# Altium PCB BorneChargement.PcbDoc
Units mm, origin at the board's own origin, x right, y up, seen from the top; angles counter-clockwise.
Board outline 60.5 x 40.5 mm, 2 copper layers (Top Layer, Bottom Layer); 12 components, 11 nets, 43 pads, 0 vias.
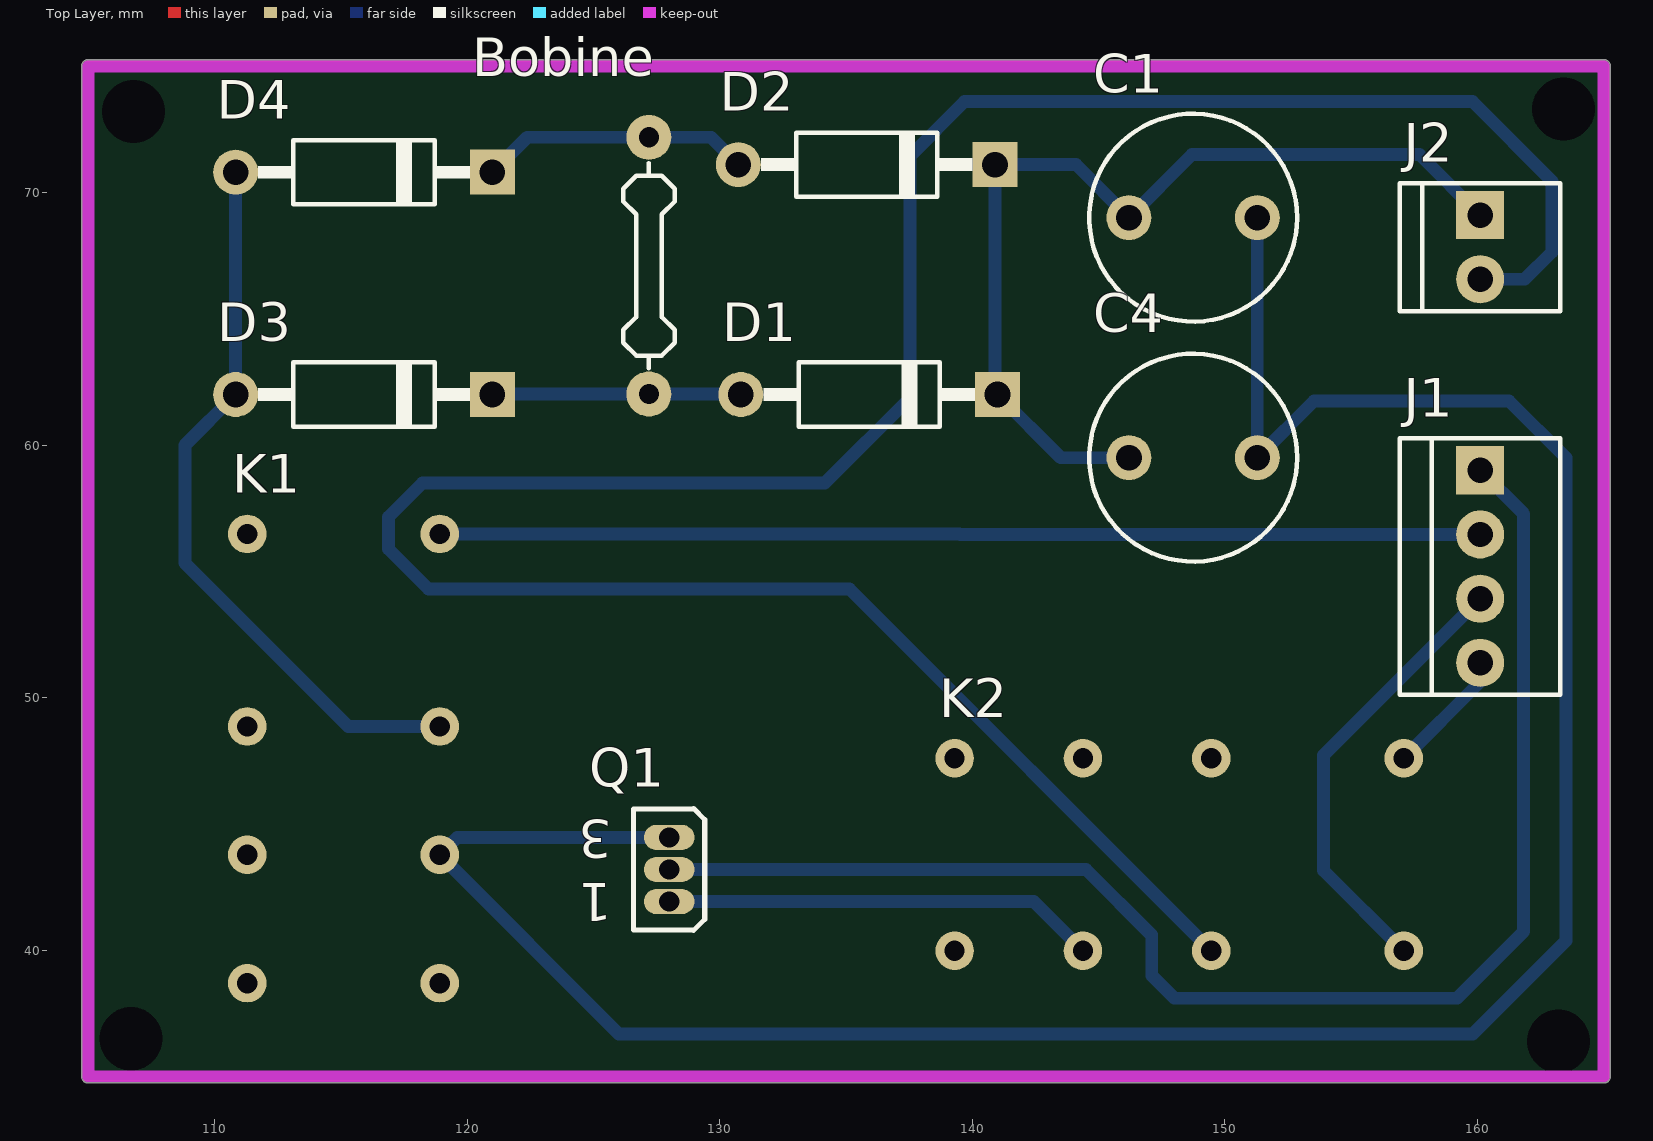
[diagram p0: Top Layer view]
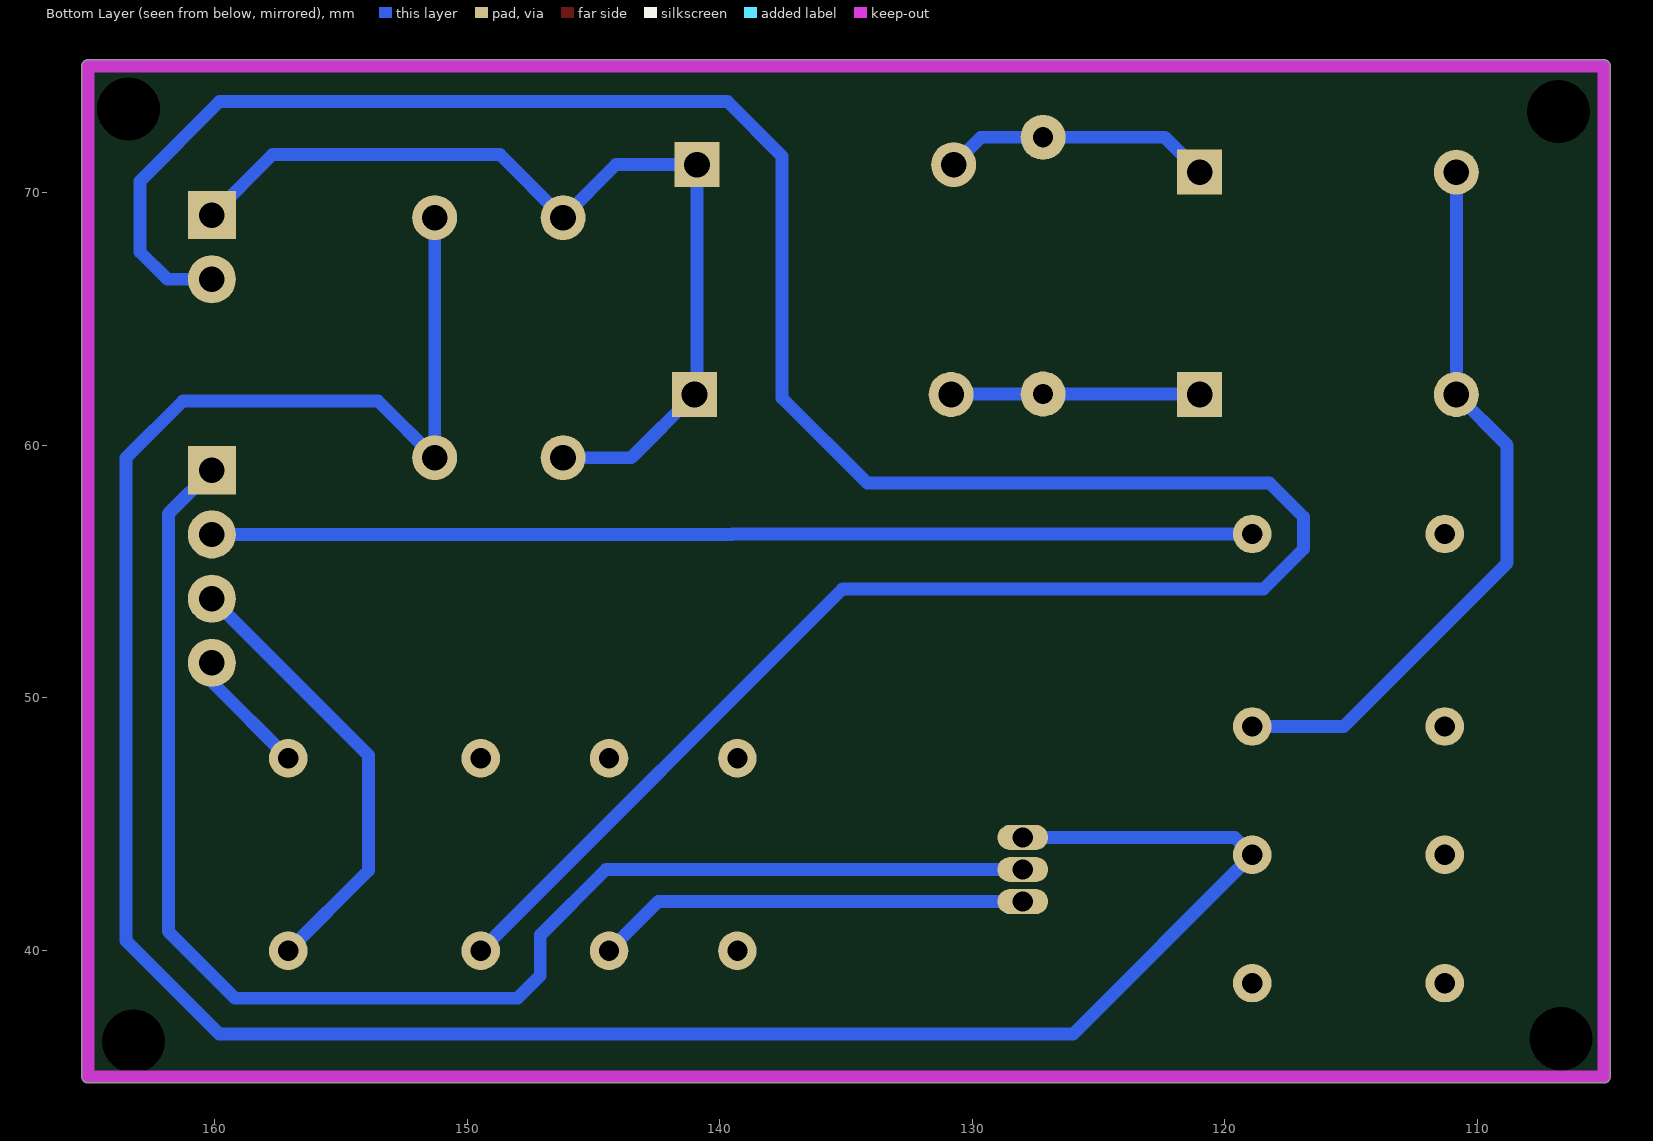
[diagram p1: Bottom Layer view, seen from below]

## Layer stack, top to bottom
Top Solder: solder mask 0.0102, Solder Resist, Dk 3.5
Top Layer: signal copper 0.0356
Dielectric 1: dielectric 0.32, FR-4, Dk 4.8
Bottom Layer: signal copper 0.0356
Bottom Solder: solder mask 0.0102, Solder Resist, Dk 3.5

## Board outline
104.75,35 ccw(c105,35) 105,34.75 165,34.75 ccw(c165,35) 165.25,35 165.25,75 ccw(c165,75) 165,75.25 105,75.25 ccw(c105,75) 104.75,75

## Design rules (kind name [scope] priority, off if disabled: settings)
Clearance [All] p1: gap=0.508
PolygonConnect [All] p1: connectstyle=Relief reliefconductorwidth=0.254 reliefentries=4 polygonreliefangle="90 Angle" airgapwidth=0.254
RoomDefinition BorneChargement [InComponentClass('BorneChargement')] p1 off: confinementstyle=ConfineIn formatcopy=TRUE lockcomponents=FALSE outline 178.943,26.924 267.589,26.924 267.589,49.276 178.943,49.276
RoutingLayers [All] p1: top layer_v5=FALSE bottom layer_v5=TRUE
RoutingVias [All] p1: holewidth=0.711 width=1.27 viastyle="Through Hole" minholewidth=0.711 minwidth=1.27 maxholewidth=0.711 maxwidth=1.27
SolderMaskExpansion [All] p1: expansion=0.102
Width [All] p1: maxlimit=0.508 minlimit=0.508 preferedwidth=0.508
29 further rules are at their usual default settings.

## Components (designator, comment, footprint, x,y, rotation, side; value= is the part's Value field where it differs from the comment)
Bobine "Res 1/4W" "Axial 0.4\" Step" 127.2,67.1 r270 top
C1 "Cap Electrolytic" "Cap Rad Round 0.325D 0.2Pad" 146.2,69 r0 top
C4 "Cap Electrolytic" "Cap Rad Round 0.325D 0.2Pad" 146.2,59.5 r0 top
D1 "Diode 1N4004" DO-41 141,62 r180 top
D2 "Diode 1N4004" DO-41 140.9,71.1 r180 top
D3 "Diode 1N4004" DO-41 121,62 r180 top
D4 "Diode 1N4004" DO-41 121,70.8 r180 top
J1 "MTA100-4" "MTA100-4 MF" 160.1,59 r180 top
J2 "Input" MTA100-2 160.1,69.1 r180 top
K1 "Relay" PCBComponent_1 111.3,38.7 r0 top
K2 "Relay" PCBComponent_1 139.3,47.6 r270 top
Q1 "MOSFET-N" E3 128,43.2 r180 top

## Footprints (in the part's own frame and the unit in brackets; to place one, negate y for a bottom-side part, rotate by r counter-clockwise, add the part's x,y. Pads: shape width x height; smd on the part's side, far side on the other; paste and mask are expansions set on the pad)
"Axial 0.4\" Step" [mil] "Axial 3D Step"
  round 70 hole 31.5: 1(-200,0) 2(200,0)
  silkscreen extent -160,-40 160,40, body extent -212,-45 212,46, height 116
"Cap Rad Round 0.325D 0.2Pad" [mil]
  round 70 hole 40: 1(0,0) 2(200,0)
  silkscreen extent -62,-162 262,162
DO-41 [mil] "Diode 400mil Spacin"
  rect 70x70 hole 40: 1(0,0)
  round 70 hole 40: 2(400,0)
  silkscreen extent 35,-50 365,50, body extent -17,-53 417,53, height 132
E3 [mm] "TO, Flat Index; 3 In-Line, Axial Leads; Body Dia. 4.6mm; Lead Dia. 0.5 mm (max)"
  oval 2x1 hole 0.8: 1(0,1.27) 2(0,0) 3(0,-1.27)
  silkscreen extent -1.41,-2.41 1.41,2.41
MTA100-2 [mil] "MTA100-2 M"
  rect 75x75 hole 39.4: 1(0,0)
  round 75 hole 39.4: 2(0,100)
  silkscreen extent -125,-50 125,150, body extent -125,-50 125,150, height 100
"MTA100-4 MF" [mil] "MTA100-4 MF"
  rect 75x75 hole 39.4: 1(0,0)
  round 75 hole 39.4: 2(0,100) 3(0,200) 4(0,300)
  silkscreen extent -125,-50 125,350, body extent -125,-50 125,350, height 627
PCBComponent_1 [mil]
  round 60 hole 31.5: 1(300,700) 4(300,400) 6(300,200) 8(300,0) 9(0,0) 11(0,200) 13(0,400) 16(0,700)

## Part data
Bobine: "Resistor"
C1 C4: "Polarized Capacitor (Radial)"
D1 D2 D3 D4: "Diode"
J1: "MTA100-4M"
J2: library part MTA100-2, "MTA Male 0 Degres"
K1 K2: library part Component_1
Q1: "N-Channel MOSFET"

## Free pads (board coordinates)
  round 1.524 hole 2.5: 0(106.8,73.2) 0(163.2,36.4) 1(106.7,36.5) 2(163.4,73.3)

## Nets (pads, with @x,y where several pads share a name; then routed paths per layer and width w, separated by ;. In a path a pad name is that pad's centre, name@x,y a point inside that pad or via, vN(x,y) a via of type N, cw(c..) or ccw(c..) an arc to the next point about the centre after c; other vN are vias at no path point)
CHARGE: J1.2 K1.1 | length 41.2
  Bottom Layer w0.508: K1.1 139.497,56.48 139.517,56.46 J1.2
DECHARGE: J1.3 K2.1 | length 17.8
  Bottom Layer w0.508: K2.1 153.9,43.16 153.9,47.72 J1.3
GND: J1.4 K1.8 K1.16 K2.8 K2.16 | length 5
  Bottom Layer w0.508: K2.16 160.1,50.62 J1.4
MOSFET: J1.1 Q1.2 | length 56.9
  Bottom Layer w0.508: Q1.2 144.5,43.2 147.1,40.6 147.1,39 148,38.1 159.182,38.1 161.823,40.742 161.823,57.277 J1.1
NetBobine_1: Bobine.1 D2.2 D4.1 | length 10.8
  Bottom Layer w0.508: D4.1 122.38,72.18 Bobine.1 129.66,72.18 D2.2
NetBobine_2: Bobine.2 D1.2 D3.1 | length 9.9
  Bottom Layer w0.508: D3.1 121.02,62.02 Bobine.2 130.82,62.02 D1.2
NetC1_1: C1.1 C4.1 D1.1 D2.1 J2.1 | length 37.5
  Bottom Layer w0.508: C4.1 143.5,59.5 D1.1 140.9,62.1 D2.1 144.1,71.1 C1.1 148.7,71.5 157.7,71.5 J2.1
NetC1_2: C1.2 C4.2 K1.6 Q1.3 | length 101.1
  Bottom Layer w0.508: Q1.3 119.61,44.47 K1.6 126.007,36.693 159.807,36.693 163.495,40.381 163.495,59.495 161.245,61.745 153.525,61.745 C4.2 C1.2
NetD3_2: D3.2 D4.2 K1.4 | length 29.1
  Bottom Layer w0.508: D4.2 D3.2 108.83,59.99 108.83,55.33 115.3,48.86 K1.4
NetJ2_2: J2.2 K2.4 | length 106.3
  Bottom Layer w0.508: K2.4 135.135,54.305 118.47,54.305 116.895,55.88 116.895,57.15 118.24,58.495 134.161,58.495 137.533,61.867 137.533,71.433 139.694,73.594 159.794,73.594 162.944,70.444 162.944,67.644 161.86,66.56 J2.2
NetK2_6: K2.6 Q1.1 | length 17.2
  Bottom Layer w0.508: Q1.1 142.43,41.93 K2.6
pads on no net: K1.9 K1.11 K1.13 K2.9 K2.11 K2.13

## Polygon pours and split planes (outlines as drawn)
GND on Top Layer "Top Layer-No Net" (solid, shelved, pour order 2): 104.819,75.181 104.792,75.153 104.792,34.861 165.07,34.861 165.139,34.792 165.181,34.833 165.181,75.181
GND on Top Layer "Top Layer-No Net" (solid, shelved, pour order 20): 104.902,75.236 104.902,34.833 104.861,34.792 104.93,34.861 165.208,34.861 165.208,75.125 165.098,75.236
GND on Bottom Layer "Top Layer-No Net" (solid, shelved, pour order 4): 104.819,75.181 104.819,34.958 104.764,34.902 104.902,34.764 165.098,34.764 165.098,75.167 165.139,75.208
GND on Bottom Layer "Top Layer-No Net" (solid, shelved, pour order 18): 104.819,75.181 104.819,34.819 165.111,34.819 165.139,34.792 165.208,34.861 165.208,75.139

## Keep-outs
Keep-Out Layer:
  lines w0.5: 105,35 105,75 165,75 165,35 105,35

## Silkscreen, mask and mechanical layers (free items; w line width, h text height)
Mechanical 1:
  text "AIMANT" at 156,66.1 h1.52 r90
  text "BOBINE" at 125.2,61.3 h1.52 r90
  text "PCB-CHARGEMENT" at 123.9,52.7 h1.52
  text "ELECTROAIMANT" at 123.9,50.3 h1.52
  text "CONNECTIONS" at 156,48.5 h1.52 r90

## Text inside footprints (layer, text, board x,y; h text height)
Q1: Top Overlay "3" at 125.725,45.163 h1.5 r180; Top Overlay "1" at 125.725,42.645 h1.5 r180